# Altium PCB PCB1.PcbDoc
Units mm, origin at the board's own origin, x right, y up, seen from the top; angles counter-clockwise.
Board outline 85.6 x 31.6 mm, 4 copper layers (Top Layer, PWR, GND, Bottom Layer), stack 0.603 mm thick; 59 components, 36 nets, 215 pads, 179 vias.
Unrouted connection lines stored in the file: 43.
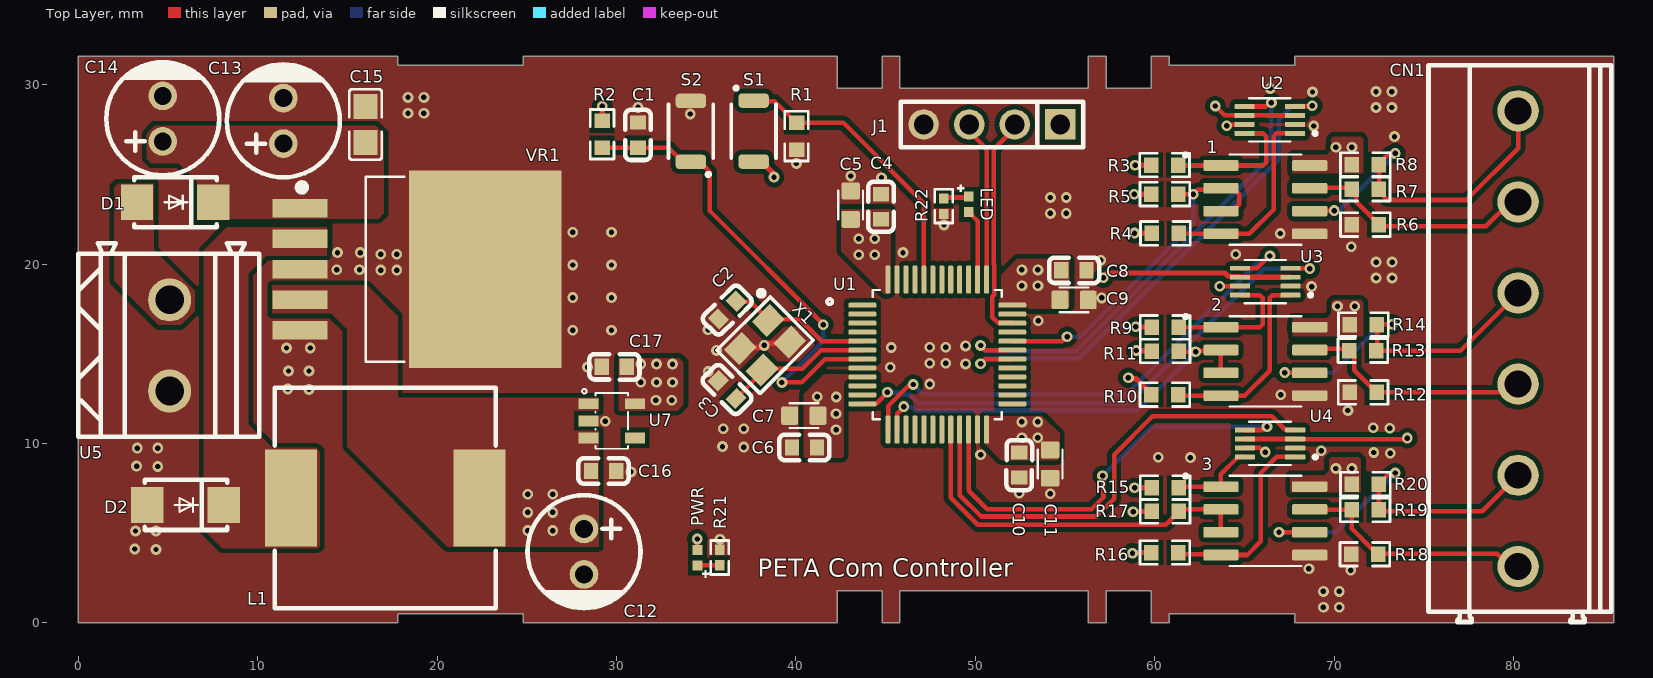
[diagram p0: Top Layer view]
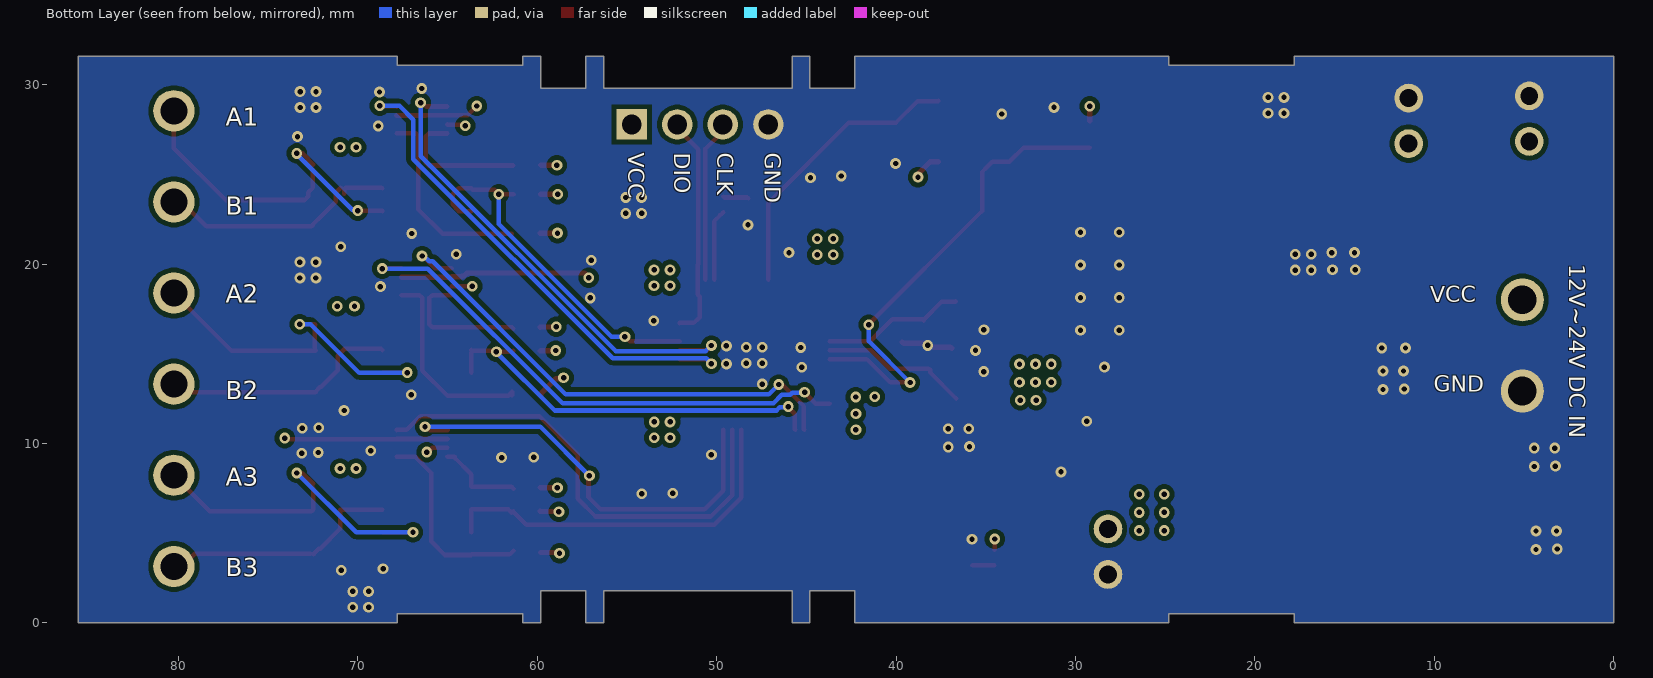
[diagram p1: Bottom Layer view, seen from below]
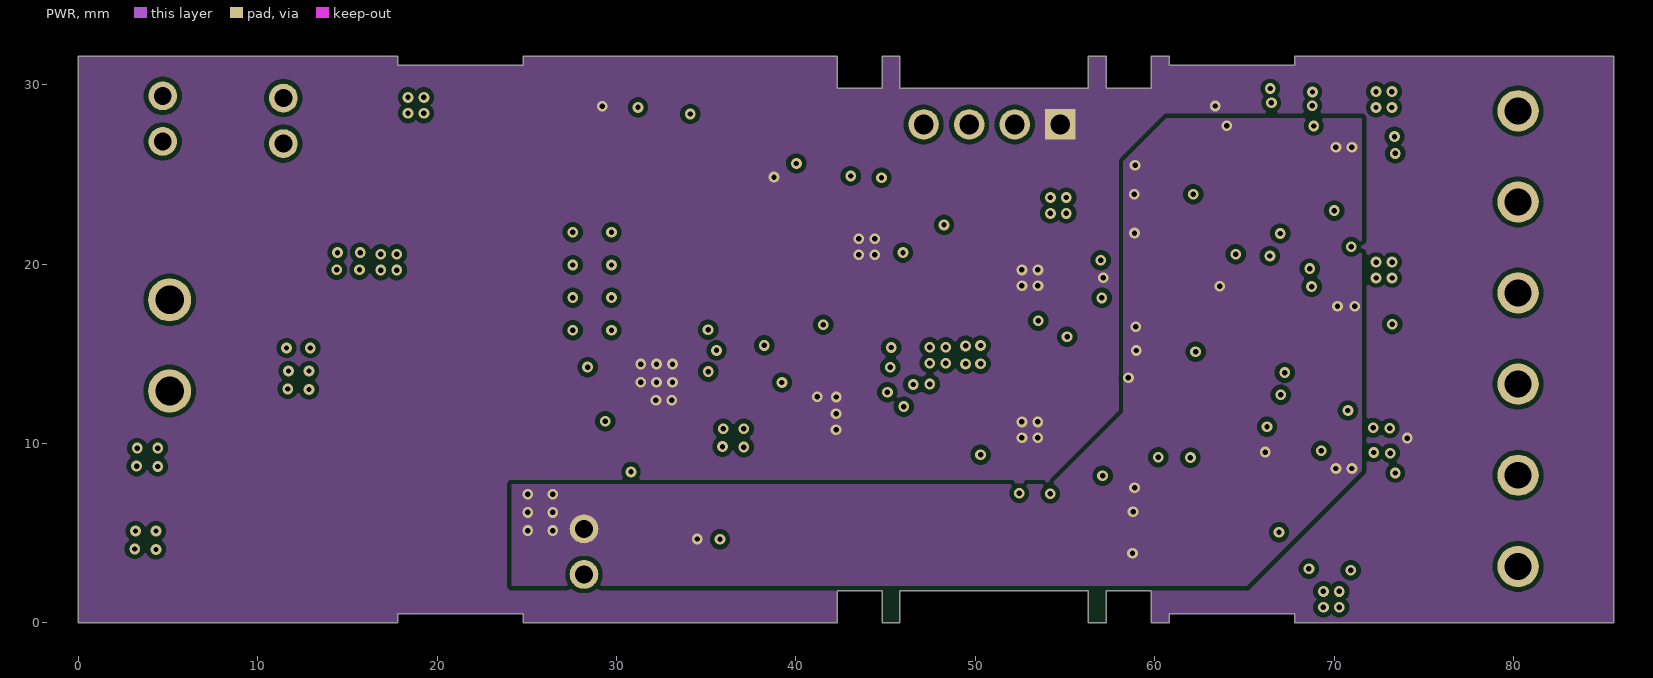
[diagram p2: PWR]
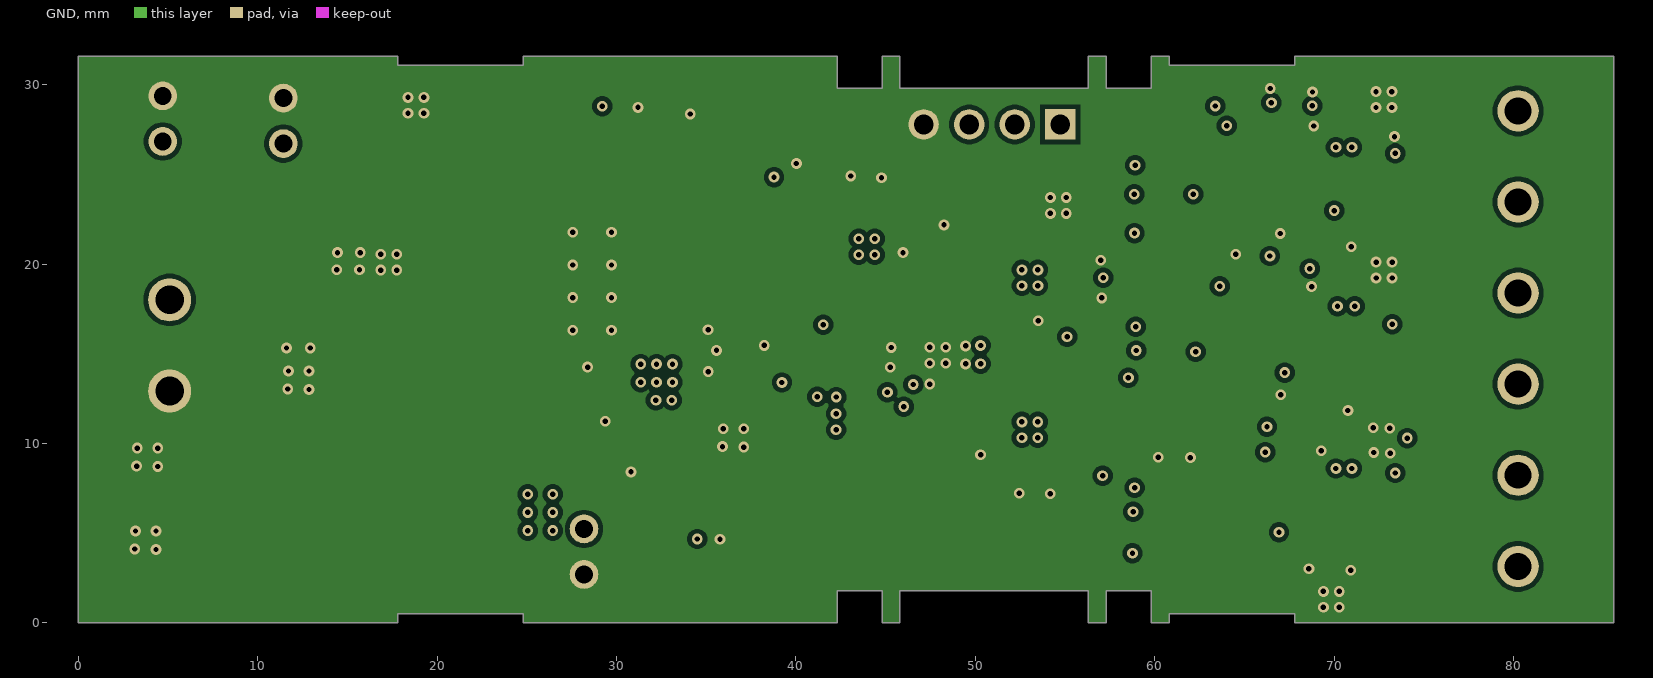
[diagram p3: GND]
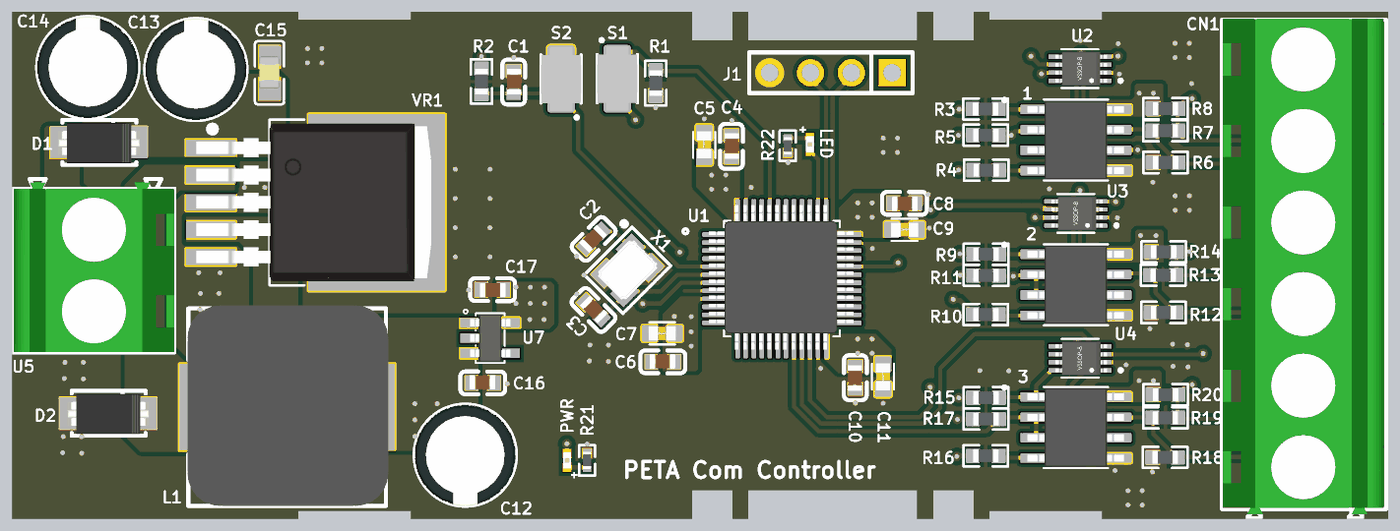
[diagram p4: 3D render of the assembled board from above, using the file's embedded part models]

## Layer stack, top to bottom
Top Solder: solder mask 0.0102, Solder Resist, Dk 3.5
Top Layer: signal copper 0.0356
Dielectric 2: prepreg 0.0711, PP-006, Dk 4.1
PWR: signal copper 0.035
Dielectric 1: dielectric 0.32, FR-4, Dk 4.8
GND: signal copper 0.035
Dielectric 3: prepreg 0.0711, PP-006, Dk 4.1
Bottom Layer: signal copper 0.0356
Bottom Solder: solder mask 0.0102, Solder Resist, Dk 3.5

## Board outline
24.8,0 42.3,0 42.3,1.8 44.8,1.8 44.8,0 45.8,0 45.8,1.8 56.3,1.8 56.3,0 57.3,0 57.3,1.8 59.8,1.8 59.8,0 60.8,0 60.8,0.5 67.8,0.5 67.8,0 85.6,0 85.6,31.6 67.8,31.6 67.8,31.1 60.8,31.1 60.8,31.6 59.8,31.6 59.8,29.8 57.3,29.8 57.3,31.6 56.3,31.6 56.3,29.8 45.8,29.8 45.8,31.6 44.8,31.6 44.8,29.8 42.3,29.8 42.3,31.6 24.8,31.6 24.8,31.1 17.8,31.1 17.8,31.6 0,31.6 0,0 17.8,0 17.8,0.5 24.8,0.5

## Design rules (kind name [scope] priority, off if disabled: settings)
Clearance [All] p1: gap=0.15 ignorepadtopadclearanceinfootprint=TRUE except(0: Arc-Hole Track-Hole SMDPad-Hole THPad-Hole Via-Hole Fill-Hole Poly-Hole Region-Hole Text-Hole; 0.254: Arc-Fill Arc-Poly Arc-Region Track-Fill Track-Poly Track-Region SMDPad-Fill SMDPad-Poly SMDPad-Region THPad-Fill THPad-Poly THPad-Region Via-Fill Via-Poly Via-Region Fill-Fill Fill-Poly Fill-Region Poly-Poly Poly-Region Region-Region)
PolygonConnect [All] p1: connectstyle=Direct reliefconductorwidth=0.254 reliefentries=4 polygonreliefangle="90 Angle" airgapwidth=0.254
RoutingVias [All] p1: holewidth=0.711 width=1.27 viastyle="Through Hole" minholewidth=0.711 minwidth=1.27 maxholewidth=0.711 maxwidth=1.27
SolderMaskExpansion [All] p1: expansion=0.102 istentingtop=FALSE
Width Width_2 [All] p1: maxlimit=0.3 minlimit=0.254 preferedwidth=0.254 minimp=50.000000 maximp=50.000000 favimp=50.000000
30 further rules are at their usual default settings.

## Classes and differential pairs
net class +3.3V: V_MCU_3.3V
component class STM32F103C8T6: C1 C2 C3 C4 C5 C6 C7 C8 C9 C10 C11 J1 LED R1 R2 R22 S1 S2 U1 X1
component class RS485: 1 2 3 CN1 R3 R4 R5 R6 R7 R8 R9 R10 R11 R12 R13 R14 R15 R16 R17 R18 R19 R20 U2 U3 U4
component class "12V to5v_5V to 3.3V": C12 C13 C14 C15 C16 C17 D1 D2 L1 PWR R21 U5 U7 VR1

## Components (designator, comment, footprint, x,y, rotation, side; value= is the part's Value field where it differs from the comment)
1 "MAX485" MAX485 66.168,23.599 r0 top
2 "MAX485" MAX485 66.168,14.582 r0 top
3 "MAX485" MAX485 66.168,5.692 r0 top
C1 "CC0603KRX7R9BB104" C0603 31.191,27.201 r270 top value=100nf,50V,±10%
C2 "20pF" C0603 36.178,17.444 r45 top value=20pF,50V,5%
C3 "20pF" C0603 36.16,13.007 r315 top value=20pF,50V,5%
C4 "CC0603KRX7R9BB104" C0603 44.74,23.199 r270 top value=100nf,50V,±10%
C5 "10uf" CAPC1608X90N 43.049,23.282 r270 top value=16V,10uF
C6 "CC0603KRX7R9BB104" C0603 40.477,9.78 r0 top value=100nf,50V,±10%
C7 "10uf" CAPC1608X90N 40.45,11.558 r0 top value=16V,10uF
C8 "CC0603KRX7R9BB104" C0603 55.5,19.662 r180 top value=100nf,50V,±10%
C9 "10uf" CAPC1608X90N 55.5,18.011 r180 top value=16V,10uF
C10 "CC0603KRX7R9BB104" C0603 52.452,8.805 r90 top value=100nf,50V,±10%
C11 "10uf" CAPC1608X90N 54.173,8.867 r90 top value=16V,10uF
C12 "470uF" Plugin,6.3x8mm 28.179,3.942 r270 top
C13 "220uF" Plugin,6.3x8mm 11.427,28.024 r90 top value=35V,220uF
C14 "220uF" Plugin,6.3x8mm 4.704,28.144 r90 top value=35V,220uF
C15 "1uf" C0805 16.003,27.79 r270 top
C16 "2.2uF,6.3V,10%" C0603 29.277,8.468 r0 top
C17 "2.2uF,6.3V,10%" C0603 29.871,14.281 r180 top
CN1 "DB128V-5.08-6P-GN-S" 6P_P=5.08mm 80.265,15.852 r90 top
D1 "SS34" SMA 5.391,23.453 r180 top value=40V,3A
D2 "SS34" SMA 5.97,6.581 r180 top
J1 "*" PIN_4,P=2.54mm 50.928,27.79 r180 top
L1 "68uH" ind_SMD_12.3x12.3mm 17.103,6.962 r0 top value=68uH,4A
LED "XL-1005UBC" "LED 0402" 49.634,23.335 r270 top value=Blue,20mA
PWR "XL-1005UBC" "LED 0402" 34.515,3.641 r90 top value=Blue,20mA
R1 "10K,75V,1%" R0603 40.031,27.145 r270 top
R2 "10K,75V,1%" R0603 29.189,27.246 r90 top
R3 "0603WAF100JT5E" R0603 60.553,25.531 r180 top value=10kΩ,75V
R4 "0603WAF100JT5E" R0603 60.592,21.723 r180 top value=10kΩ,75V
R5 "0603WAF100JT5E" R0603 60.568,23.902 r180 top value=10kΩ,75V
R6 "20k" R0603 71.747,22.202 r180 top value=20k,75V
R7 "120R" R0603 71.736,24.181 r0 top value=120Ω.75V
R8 "20k" R0603 71.742,25.559 r0 top value=20k,75V
R9 "0603WAF100JT5E" R0603 60.583,16.484 r180 top value=10kΩ,75V
R10 "0603WAF100JT5E" R0603 60.568,12.732 r180 top value=10kΩ,75V
R11 "0603WAF100JT5E" R0603 60.583,15.16 r180 top value=10kΩ,75V
R12 "20k" R0603 71.62,12.86 r180 top value=20k,75V
R13 "120R" R0603 71.603,15.182 r0 top value=120Ω.75V
R14 "20k" R0603 71.631,16.63 r0 top value=20k,75V
R15 "0603WAF100JT5E" R0603 60.581,7.549 r180 top value=10kΩ,75V
R16 "0603WAF100JT5E" R0603 60.564,3.926 r180 top value=10kΩ,75V
R17 "0603WAF100JT5E" R0603 60.581,6.219 r180 top value=10kΩ,75V
R18 "20k" R0603 71.719,3.829 r180 top value=20k,75V
R19 "120R" R0603 71.736,6.303 r0 top value=120Ω.75V
R20 "20k" R0603 71.749,7.739 r0 top value=20k,75V
R21 "2.2KΩ" R0402 35.756,3.648 r270 top value=2.2kΩ,50V,1%
R22 "2.2KΩ" R0402 48.242,23.238 r90 top value=2.2kΩ,50V,1%
S1 "B3U-1000P" B3U-1000P 37.636,27.42 r90 top
S2 "B3U-1000P" B3U-1000P 34.143,27.404 r270 top
U1 "STM32F103C8T6" STM32F103C8T6 47.88,14.963 r0 top
U2 "TXS0102DCUR" 8-VSSOP 66.422,28.044 r180 top value="2 Channel 24Mbps"
U3 "TXS0102DCUR" 8-VSSOP 66.168,19.027 r180 top value="2 Channel 24Mbps"
U4 "TXS0102DCUR" 8-VSSOP 66.43,10.006 r180 top value="2 Channel 24Mbps"
U5 "DB128L-5.08-2P-GN-S" 2P_P=5.08mm 5.081,15.471 r270 top
U7 "SE5218ALG-LF" SOT-23-5 29.729,11.265 r180 top
VR1 "LM2596S-5.0" TO-263-5 16.858,19.741 r180 top
X1 "8MHz" SMD3225-4P 38.279,15.484 r225 top

## Footprints (in the part's own frame and the unit in brackets; to place one, negate y for a bottom-side part, rotate by r counter-clockwise, add the part's x,y. Pads: shape width x height; smd on the part's side, far side on the other; paste and mask are expansions set on the pad)
2P_P=5.08mm [mm]
  round 2.4 hole 1.6: 1(-2.54,0) 2(2.54,0)
  silkscreen extent -5.7,-5.1 5.1,5, body extent -5.48,-5 5.08,5, height 14
6P_P=5.08mm [mm]
  round 2.3 hole 1.5 paste+0 mask+0.05: 1(-12.7,0) 2(-7.62,0) 3(-2.54,0) 4(2.54,0) 5(7.62,0) 6(12.7,0)
  silkscreen extent -15.8,-5.2 15.24,5, body extent -15.57,-5.05 15.31,4.95, height 14
8-VSSOP [mm]
  rrect25% 1.12x0.27 smd: 1(-1.405,0.75) 2(-1.405,0.25) 3(-1.405,-0.25) 4(-1.405,-0.75) 5(1.405,-0.75) 6(1.405,-0.25) 7(1.405,0.25) 8(1.405,0.75)
  silkscreen extent -2.62,-1.2 1.15,1.2, body extent -1.67,-1.05 1.53,1.05, height 0.9
B3U-1000P [mm]
  rrect50% 0.8x1.7 smd: 1(1.7,0) 2(-1.7,0)
  silkscreen extent -1.5,-1.25 2.49,1.25, body extent -2,-1.25 2,1.25, height 1.6
C0603 [mm]
  rect 0.8x0.9 smd paste+0 mask+0.051: 1(-0.7,0) 2(0.7,0)
  silkscreen extent -1.41,-0.71 1.39,0.72, body extent -0.83,-0.42 0.77,0.48, height 0.8
C0805 [mm]
  rect 1.41x1.35 smd paste-100 mask+0.051: 1(-1,0) 2(1,0)
  silkscreen extent -1.96,-0.9 1.96,0.9, body extent -1.03,-0.64 0.97,0.62, height 1.23
CAPC1608X90N [mm]
  rrect20% 0.94x1.02 smd: 1(-0.8,0) 2(0.78,0)
  silkscreen extent -0.81,-0.69 0.79,0.69, body extent -0.87,-0.45 0.83,0.45, height 0.9
ind_SMD_12.3x12.3mm [mm]
  rect 2.9x5.4 smd: 1(-5.25,0) 2(5.25,0)
  silkscreen extent -6.15,-6.15 6.15,6.15, body extent -6.21,-6.16 6.29,6.34, height 6
"LED 0402" [mm]
  rect 0.566x0.54 smd paste-100 mask+0.051: 1(-0.433,0) 2(0.433,0)
  silkscreen extent -1.11,-0.65 -0.71,-0.25, body extent -0.5,-0.26 0.5,0.24, height 0.35
MAX485 [mm]
  rrect25% 1.97x0.59 smd: 1(-2.475,1.905) 2(-2.475,0.635) 3(-2.475,-0.635) 4(-2.475,-1.905) 5(2.475,-1.905) 6(2.475,-0.635) 7(2.475,0.635) 8(2.475,1.905)
  silkscreen extent -4.54,-2.52 2,2.59, body extent -3.01,-2.45 2.99,2.45, height 1.75
PIN_4,P=2.54mm [mm]
  rect 1.7x1.7 hole 1.1 paste+0 mask+0.051: 1(-3.81,0)
  round 1.7 hole 1.1 paste+0 mask+0.051: 2(-1.27,0) 3(1.27,0) 4(3.81,0)
  silkscreen extent -5.08,-1.27 5.08,1.27
Plugin,6.3x8mm [mm]
  round 1.6 hole 1: 1(-1.3,0.005) 2(1.24,0.005)
  silkscreen extent -3.18,-3.15 3.14,3.15, body extent -3.17,-3.15 3.13,3.15, height 8
R0402 [mm]
  rect 0.566x0.54 smd paste-100 mask+0.051: 1(-0.433,0) 2(0.433,0)
  silkscreen extent -0.94,-0.5 0.94,0.5, body extent -0.55,-0.25 0.55,0.25, height 0.32
R0603 [mm]
  rect 0.806x0.864 smd paste-100 mask+0.051: 1(-0.753,0) 2(0.753,0)
  silkscreen extent -1.39,-0.66 1.39,0.66, body extent -0.8,-0.4 0.8,0.4, height 0.45
SMA [mm]
  rect 1.801x1.999 smd mask+0.05: A(2.129,0) C(-2.129,0)
  silkscreen extent -2.33,-1.4 2.27,1.4, body extent -2.56,-1.21 2.54,1.29, height 2.41
SMD3225-4P [mm]
  rect 1.4x1.2 smd paste+0 mask+0.051: 1(-1.1,-0.85) 2(1.1,-0.85) 3(1.1,0.85) 4(-1.1,0.85)
  silkscreen extent -2.1,-2.35 2.1,1.7, body extent -1.62,-1.26 1.58,1.24, height 0.55
SOT-23-5 [mm]
  rect 1.1x0.6 smd: 1(1.3,-0.95) 2(1.3,0) 3(1.3,0.95) 4(-1.3,0.95) 5(-1.3,-0.95)
  silkscreen extent -0.9,-1.78 1.65,1.55, body extent -1.26,-1.5 1.24,1.5, height 1.1
STM32F103C8T6 [mm]
  rrect50% 1.56x0.28 smd: 1(-4.18,2.75) 2(-4.18,2.25) 3(-4.18,1.75) 4(-4.18,1.25) 5(-4.18,0.75) 6(-4.18,0.25) 7(-4.18,-0.25) 8(-4.18,-0.75) 9(-4.18,-1.25) 10(-4.18,-1.75) 11(-4.18,-2.25) 12(-4.18,-2.75) 25(4.18,-2.75) 26(4.18,-2.25) 27(4.18,-1.75) 28(4.18,-1.25) 29(4.18,-0.75) 30(4.18,-0.25) 31(4.18,0.25) 32(4.18,0.75) 33(4.18,1.25) 34(4.18,1.75) 35(4.18,2.25) 36(4.18,2.75)
  rrect50% 0.28x1.56 smd: 13(-2.75,-4.18) 14(-2.25,-4.18) 15(-1.75,-4.18) 16(-1.25,-4.18) 17(-0.75,-4.18) 18(-0.25,-4.18) 19(0.25,-4.18) 20(0.75,-4.18) 21(1.25,-4.18) 22(1.75,-4.18) 23(2.25,-4.18) 24(2.75,-4.18) 37(2.75,4.18) 38(2.25,4.18) 39(1.75,4.18) 40(1.25,4.18) 41(0.75,4.18) 42(0.25,4.18) 43(-0.25,4.18) 44(-0.75,4.18) 45(-1.25,4.18) 46(-1.75,4.18) 47(-2.25,4.18) 48(-2.75,4.18)
  silkscreen extent -6.15,-3.6 3.6,3.6, body extent -4.55,-4.41 4.45,4.59, height 1.72
TO-263-5 [mm]
  rect 3.083x1.02 smd: 1(4.507,-3.371) 2(4.507,-1.671) 3(4.507,0.029) 4(4.507,1.729) 5(4.507,3.429)
  rect 8.5x11 smd: 6(-5.813,0.029)
  silkscreen extent -1.31,-5.13 4.6,5.19, body extent -9.19,-4.89 5.41,4.93, height 4.22

## Part data
1 2 3: "1/1 Transceiver Half RS422, RS485 8-SOIC", Manufacturer="Maxim Integrated", Package="SOIC-8 Maxim Integrated", MPN=MAX485
C1 C4 C6 C8 C10: "50V 100nF X7R ±10% 0603 Multilayer Ceramic Capacitors MLCC - SMD/SMT ROHS", LCSC=C14663, Manufacturer=KEMET, Max Operating Temp="35 °C", Min Operating Temp="15 °C", MPN=603-CC603KRX7R9BB104, Package=0603, Datasheet=http://componentsearchengine.com/Datasheets/3/CC0603KRX7R9BB104.pdf
C2 C3: library part CL10C200JB8NNNC, "50V 20pF C0G ±5% 0603 Multilayer Ceramic Capacitors MLCC - SMD/SMT ROHS", LCSC=C1648, Manufacturer="SHOU HAN", Max Operating Temp=+125, Min Operating Temp=-55, Package=0603, Datasheet=https://datasheet.lcsc.com/lcsc/2304140030_Samsung-Electro-Mechanics-CL10C200JB8NNNC_C1648.pdf, MPN=CL10C200JB8NNNC
C5 C7 C9 C11: library part 0603F106M160NT, "16V 10uF Y5V ±20% 0603 Multilayer Ceramic Capacitors MLCC - SMD/SMT ROHS", LCSC=C48906, Manufacturer=KEMET, MPN=CC0603KRX7R9BB104, Package=0603, Datasheet=http://componentsearchengine.com/Datasheets/3/CC0603KRX7R9BB104.pdf
C12: library part SPTOJM471E08OR, "6.3V 470uF ±20% Plugin,6.3x8mm Solid Capacitors ROHS", Manufacturer=Panasonic, MPN=EEE-HC1H101P, Package Reference="RADIAL-2 Panasonic"
C13 C14: library part NPXC1101V221MJTM, "220uF 35V ±20% Plugin,D6.3xL11mm Aluminum Electrolytic Capacitors - Leaded ROHS", LCSC=C2976311, Manufacturer=Ymin, Package=Plugin,D6.3xL11mm, Datasheet=https://www.lcsc.com/datasheet/lcsc_datasheet_2205250916_Ymin-NPXC1101V221MJTM_C2976311.pdf, MPN=NPXC1101V221MJTM
C15: library part CL21B105KBFNNNE, "50V 1uF X7R ±10% 0805 Multilayer Ceramic Capacitors MLCC - SMD/SMT ROHS", Manufacturer=KEMET, MPN=CC0603JRNPO9BN180
C16 C17: library part CGA3E1X7R0J225K080AC, "CAP CER 2.2UF 6.3V X7R 0603", Manufacturer="TDK Corporation", Max Operating Temp=125°C, Min Operating Temp=-55°C, Package=0603, Datasheet=https://product.tdk.com/system/files/dam/doc/product/capacitor/ceramic/mlcc/catalog/mlcc_automotive_general_en.pdf, MPN=CGA3E1X7R0J225K080AC, Type=SM
CN1: "1x6P 20A -40℃~+105℃ 300V Green 12~30 Direct Insert 5.08mm 2.5 1 6 Plugin,P=5.08mm Screw Terminal", LCSC=C2915642, Manufacturer=DORABO, Operating Temperature Range=-40℃~+105℃, Package=插件,P=5.08mm, Datasheet=https://atta.szlcsc.com/upload/public/pdf/source/20230106/CC449C10514519CDCE20F1C37DBF2DAC.pdf, MPN=DB128V-5.08-6P-GN-S
D1: "Diode Schottky 40V 3A 2-Pin SMC T/R", Package=None, MPN=SS34
D2: "Diode Schottky 40V 3A 2-Pin SMC T/R", Package Reference=None, MPN=SS34
J1: library part PZ254V-11-04P, "Straight Square Pins 2.5mm 4P 6mm -40℃~+105℃ 3mm 2.54mm Plugin Black Brass 1x4P Plugin,P=2.54mm Pin Headers ROHS", LCSC=C2691448, Manufacturer=XFCN, Max temp=105°C, Min temp=-40°C, Package=Plugin,P=2.54mm, Datasheet=https://datasheet.lcsc.com/lcsc/2304140030_XFCN-PZ254V-11-04P_C492403.pdf, MPN=PZ254V-11-04P, Type=TH
L1: library part SMDRI127-680MT, "2.1A 68uH Shielded inductor ±20% 4A SMD,12.3x12.3mm Power Inductors ROHS", LCSC=C9907, Manufacturer=SXN(顺翔诺), Package=SMD,12.3x12.3mm, Datasheet=https://atta.szlcsc.com/upload/public/pdf/source/20210810/6F96FDC19AA308DD2AD166FFB9640E87.pdf, MPN=SMDRI127-680MT
LED PWR: "20mA 240mcd Colorless Transparent Lens -20℃~+85℃ 455nm~475nm Positive Stick Blue 120° 70mW 3.3V 0402 LED Indication - Discrete ROHS", LCSC=C22355736, Manufacturer=XINGLIGHT, Package=0402, Datasheet=https://www.lcsc.com/datasheet/lcsc_datasheet_2409271833_XINGLIGHT-XL-1005UBC_C22355736.pdf, MPN=XL-1005UBC
R1 R2: library part 0603WAF1002T5E, "100mW Thick Film Resistors ±100ppm/℃ ±1% 10kΩ 0603 Chip Resistor - Surface Mount ROHS", LCSC=C25804, Manufacturer="UNI-ROYAL(Uniroyal Elec)", Max Operating Temp=155℃, Min Operating Temp=-55℃, Package=0603, Datasheet=https://datasheet.lcsc.com/szlcsc/Uniroyal-Elec-0603WAF1002T5E_C25804.pdf, MPN=0603WAF1002T5E
R3 R4 R5 R9 R10 R11 R15 R16 R17: "100mW Thick Film Resistors ±1% ±400ppm/℃ 10Ω 0603 Chip Resistor - Surface Mount ROHS", LCSC=C25804, Manufacturer="UNI-ROYAL(Uniroyal Elec)", MPN=0603WAF1002T5E, Package=0603, Datasheet=https://datasheet.lcsc.com/szlcsc/Uniroyal-Elec-0603WAF1002T5E_C25804.pdf
R6 R8 R12 R14 R18 R20: library part 0603WAF2002T5E, "100mW Thick Film Resistors ±100ppm/℃ ±1% 20kΩ 0603 Chip Resistor - Surface Mount ROHS", LCSC=C4184, Manufacturer="UNI-ROYAL(Uniroyal Elec)", MPN=0603WAF1002T5E, Package=0603, Datasheet=https://datasheet.lcsc.com/szlcsc/Uniroyal-Elec-0603WAF1002T5E_C25804.pdf
R7 R13 R19: library part 0603WAF1200T5E, "100mW Thick Film Resistors 75V ±100ppm/℃ ±1% 120Ω 0603 Chip Resistor - Surface Mount ROHS", LCSC=C22787, Manufacturer="UNI-ROYAL(Uniroyal Elec)", MPN=0603WAF1002T5E, Package=0603, Datasheet=https://datasheet.lcsc.com/szlcsc/Uniroyal-Elec-0603WAF1002T5E_C25804.pdf
R21 R22: library part RC0402FR-072K2L, "62.5mW Thick Film Resistors 50V ±100ppm/℃ ±1% 2.2kΩ 0402 Chip Resistor - Surface Mount ROHS", LCSC=C114762, Manufacturer=YAGEO, Max Operating Temp=+155, Min Operating Temp=-55, Package=0402, Datasheet=https://datasheet.lcsc.com/lcsc/2304140030_YAGEO-RC0402FR-072K2L_C114762.pdf, MPN=RC0402FR-072K2L
S1 S2: "2.5mm 1.6mm Round Button 50mA Brick nogging 3mm SPST 153gf 12V SMD,2.5x3mm Tactile Switches ROHS", LCSC=C231329, Manufacturer="Omron Electronics", MPN=653-B3U-1000P, Datasheet=https://www.omron.com/ecb/products/pdf/en-b3u.pdf
U1: "Mainstream Performance line, ARM Cortex-M3 MCU with 64 Kbytes Flash, 72 MHz CPU, motor control, USB and CAN", LCSC=C8734, Manufacturer=STMicroelectronics, Package=LQFP-48(7x7), Datasheet=https://datasheet.lcsc.com/lcsc/2302211130_STMicroelectronics-STM32F103C8T6_C8734.pdf
U2 U3 U4: "2-Bit Bidirectional Voltage-Level Shifter for Open-Drain and Push-Pull Application 8-VSSOP -40 to 85", LCSC=C53434, Manufacturer="Texas Instruments", Package="VSSOP-8 Texas Instruments", Datasheet=https://www.ti.com/general/docs/suppproductinfo.tsp?distId=10&gotoUrl=https%3A%2F%2Fwww.ti.com%2Flit%2Fgpn%2Ftxs0102, MPN=TXS0102DCUR
U5: "1x2P 18A -40℃~+105℃ 250V Green 12~30 Direct Insert 5.08mm 2.5 1 2 Plugin,P=5.08mm Screw Terminal", LCSC=C395868, Manufacturer=DORABO, Operating Temperature Range=-40℃~+105℃, Package=插件,P=5.08mm, Datasheet=https://atta.szlcsc.com/upload/public/pdf/source/20230106/B067FE0E641A396A370D47F93C345689.pdf, MPN=DB128L-5.08-2P-GN-S
U7: "75dB 500mA Adjustable 3.3V Positive electrode 5V SOT-23-5 Voltage Regulators - Linear, Low Drop Out (LDO) Regulators ROHS", LCSC=C118233, Manufacturer=SEAWARD(思旺), Package=SOT-23-5, Datasheet=https://www.lcsc.com/datasheet/lcsc_datasheet_2304140030_Seaward-Elec-SE5218ALG-LF_C118233.pdf, MPN=SE5218ALG-LF
VR1: "Step-down type Fixed 40V~40V 5V 3A TO-263-5 DC-DC Converters ROHS", Package Reference=None, MPN=LM2596S-5.0
X1: library part X32258MSB4SI, "8MHz Surface Mount Crystal 20pF ±10ppm ±20ppm SMD3225-4P Crystals ROHS", LCSC=C2682774, Manufacturer=YXC, Operating Temperature=-40℃~+85℃, Package=SMD3225-4P, Datasheet=https://www.lcsc.com/datasheet/lcsc_datasheet_2411121006_YXC-Crystal-Oscillators-X32258MSB4SI_C2682774.pdf, MPN=X32258MSB4SI

## Via types
v1: diameter 0.6, hole 0.3, Top Layer to Bottom Layer, tented both sides, 179 vias

## Nets (pads, with @x,y where several pads share a name; then routed paths per layer and width w, separated by ;. In a path a pad name is that pad's centre, name@x,y a point inside that pad or via, vN(x,y) a via of type N, cw(c..) or ccw(c..) an arc to the next point about the centre after c; other vN are vias at no path point)
+5V: 1.8 2.8 3.8 C12.1 C16.1 L1.2 PWR.2 R3.2 R4.2 R5.2 R8.1 R9.2 R10.2 R11.2 R14.1 R15.2 R16.2 R17.2 R20.1 U2.7 U3.7 U4.7 U7.1 U7.3 VR1.4 | length 13.3
  Top Layer w0.254: v1(34.499,4.68) 34.507,4.672 34.507,4.082 PWR.2 ; v1(63.628,18.773) 63.63,18.775 64.761,18.775 U3.7 ; v1(64.023,27.725) 64.084,27.786 65.009,27.786 U2.7 ; U4.7 65.862,9.756 66.093,9.525 v1(66.171,9.525)
  Top Layer w0.3: v1(58.535,13.676) 58.592,13.619 58.957,13.619 59.815,12.761 R10.2 ; v1(58.761,3.89) 58.788,3.89 58.824,3.926 R16.2 ; v1(58.797,6.201) 58.806,6.21 59.819,6.21 R17.2 ; v1(58.861,23.897) 58.864,23.9 59.812,23.9 R5.2 ; v1(58.875,21.735) 58.881,21.729 59.833,21.729 R4.2 ; v1(58.879,7.54) 58.884,7.545 59.823,7.545 R15.2 ; v1(58.908,25.514) 58.917,25.523 59.791,25.523 R3.2 ; v1(58.947,16.513) 58.962,16.499 59.815,16.499 R9.2 ; v1(58.97,15.187) 58.984,15.174 59.816,15.174 R11.2
  other v1: 25.044,5.147 26.441,5.147 25.044,6.163 26.441,6.163 25.044,7.179 26.441,7.179 70.105,8.613 70.994,8.613 70.193,17.652 71.155,17.652 70.105,26.52 70.994,26.52
+12V: D1.A U5.1
BOOT0: R1.1 S1.1 U1.44 | length 16.1
  Top Layer w0.254: S1.1 37.662,29.094 38.807,29.094 40.002,27.899 R1.1 42.627,27.899 47.13,23.396 U1.44
CRYSTAL_IN: C2.2 U1.5 X1.1 | length 8
  Top Layer w0.254: C2.2 36.708,17.904 37.463,17.904 38.456,16.911 X1.1 38.526,16.934 40.211,16.934 41.432,15.713 U1.5
CRYSTAL_OUT: C3.2 U1.6 X1.3 | length 8.2
  Top Layer w0.254: C3.2 38.102,13.959 X1.3 38.173,14.176 40.358,14.176 41.395,15.213 U1.6
GND: 1.5 2.5 3.5 C1.1 C2.1 C3.1 C4.1 C5.1 C6.1 C7.1 C8.1 C9.1 C10.1 C11.1 C12.2 C13.2 C14.2 C15.1 C16.2 C17.2 D2.A J1.4 R1.2 R6.2 R12.2 R18.2 R21.1 R22.1 S2.2 U1.8 U1.23 U1.35 U1.47 U2.2 U3.2 U4.2 U5.2 U7.2 VR1.3 VR1.5 VR1.6 X1.2 X1.4 | length 2.9
  Top Layer w0.3: X1.2 36.971,15.378 38.053,15.378 38.149,15.474 38.311,15.474 38.427,15.59 39.587,15.59 X1.4
  other v1: 69.407,0.869 70.296,0.869 69.407,1.758 70.296,1.758 70.933,2.934 68.6,3.019 4.319,4.097 3.135,4.124 35.764,4.666 3.176,5.126 4.319,5.126 54.182,7.202 52.446,7.224 30.802,8.422 4.424,8.719 3.24,8.746 61.992,9.217 60.203,9.238 50.293,9.375 73.137,9.466 72.216,9.505 69.287,9.594 3.281,9.748 4.424,9.748 37.086,9.804 35.902,9.831 35.943,10.833 37.086,10.833 73.109,10.849 72.192,10.887 29.367,11.25 70.774,11.844 67.031,12.725 12.854,13.018 11.67,13.045 47.457,13.316 35.116,14.012 11.711,14.047 12.854,14.047 28.384,14.262 45.257,14.251 49.457,14.441 47.46,14.483 48.349,14.483 35.568,15.193 11.599,15.331 12.921,15.331 45.307,15.354 47.46,15.372 48.349,15.372 49.457,15.446 38.23,15.474 27.56,16.318 29.719,16.318 35.101,16.345 53.511,16.846 57.048,18.122 27.56,18.138 29.719,18.138 68.748,18.752 72.346,19.229 73.235,19.229 16.851,19.67 17.74,19.67 14.398,19.686 15.668,19.686 27.56,19.958 29.719,19.958 72.346,20.118 73.235,20.118 56.987,20.217 16.851,20.559 17.74,20.559 64.517,20.551 14.438,20.648 15.708,20.648 45.966,20.649 70.964,20.968 67.003,21.712 27.56,21.779 29.719,21.779 48.257,22.19 54.185,22.831 55.074,22.831 54.185,23.72 55.074,23.72 44.767,24.82 43.051,24.916 40.024,25.618 73.37,27.114 68.871,27.707 34.107,28.374 18.369,28.41 19.258,28.41 31.197,28.741 72.339,28.736 73.228,28.736 18.369,29.299 19.258,29.299 68.797,29.603 72.339,29.625 73.228,29.625 66.438,29.798
Net1_1: 1.1 R3.1 U2.8 | length 7.7
  Top Layer w0.254: R3.1@61.333,25.504 1.1 66.06,25.504 66.209,25.653 66.209,27.137 66.06,27.286 65.025,27.286 U2.8
Net1_4: 1.4 R4.1 U2.1 | length 11.1
  Top Layer w0.254: R4.1@61.417,21.703 63.684,21.703 1.4 65.279,21.694 66.633,23.048 66.633,27.145 66.782,27.294 U2.1
Net2_1: 2.1 R9.1 U3.8 | length 7.6
  Top Layer w0.254: R9.1@61.331,16.407 61.411,16.487 2.1 65.864,16.487 66.013,16.636 66.013,18.128 65.864,18.277 U3.8
Net2_4: 2.4 R10.1 U3.1 | length 11.1
  Top Layer w0.254: R10.1@61.411,12.686 R10.1@61.411,12.881 ; R10.1@61.422,12.863 61.619,12.665 2.4@63.681,12.665 ; 2.4 65.025,12.677 66.417,14.069 66.417,18.128 66.566,18.277 U3.1
Net3_1: 3.1 R15.1 U4.8 | length 4.9
  Top Layer w0.254: R15.1@61.329,7.48 61.433,7.584 63.68,7.584 3.1 63.693,8.297 64.592,9.196 64.592,9.248 64.6,9.256 U4.8
Net3_4: 3.4 R16.1 U4.1 | length 11.1
  Top Layer w0.254: R16.1@61.329,4.024 61.535,3.818 63.662,3.818 3.4 65.152,3.787 65.914,4.549 65.914,8.359 66.811,9.256 U4.1
NetC13_1: C13.1 C14.1 C15.2 D1.C VR1.1
NetD2_C: D2.C L1.1 VR1.2
NetLED_1: LED.1 R22.2 | length 1.4
  Top Layer w0.254: R22.2 48.291,23.719 49.586,23.719 LED.1
NetLED_2: LED.2 U1.38 | length 4
  Top Layer w0.254: LED.2 49.634,22.889 49.777,22.746 49.79,22.746 50.13,22.406 U1.38
NetPWR_1: PWR.1 R21.2 | length 1.2
  Top Layer w0.254: PWR.1 34.519,3.212 35.753,3.212 R21.2
NRST: C1.2 R2.1 S2.1 U1.7 | length 26.9
  Top Layer w0.254: R2.1 29.197,26.501 C1.2 32.896,26.501 33.693,25.704 34.633,25.704 34.906,25.431 34.915,25.431 35.206,25.14 35.206,22.968 41.527,16.647 v1(41.527,16.619) ; v1(39.219,13.408) 40.328,13.408 41.633,14.713 U1.7
  Bottom Layer w0.254: v1(39.219,13.408) 41.527,15.716 v1(41.527,16.619)
RS450_EN1: 1.2 1.3 R5.1 U1.32 | length 20
  Top Layer w0.254: U1.32 54.836,15.713 55.077,15.955 v1(55.117,15.955) ; R5.1 61.329,23.894 v1(62.151,23.894) ; v1@62.151,23.909 62.386,24.144 63.603,24.144 1.2 64.383,24.234 64.72,23.897 64.72,23.345 64.551,23.176 64.551,23.132 64.383,22.964 1.3
  Bottom Layer w0.254: v1(55.117,15.955) 55.863,15.955 62.151,22.243 v1@62.151,23.961
RS450_EN2: 2.2 2.3 R11.1 U1.14 | length 22.8
  Top Layer w0.254: U1.14 45.643,10.796 45.643,11.657 46.007,12.021 v1(46.007,12.06) ; R11.1 61.377,15.119 v1(62.28,15.119) ; v1@62.274,15.126 62.316,15.168 63.644,15.168 2.2 ; 2.2@63.611,15.131 63.693,15.049 2.3
  Bottom Layer w0.254: v1(46.007,12.06) 46.035,12.032 46.479,12.032 46.666,11.845 59.032,11.845 62.28,15.094 v1(62.28,15.119)
RS450_EN3: 3.2 3.3 R17.1 U1.20 | length 21.1
  Top Layer w0.254: U1.20 48.63,6.974 50.134,5.47 60.614,5.47 61.334,6.19 R17.1 ; R17.1@61.424,6.14 61.61,6.327 3.2 3.3
"RS485 A1": 1.6 CN1.6 R7.2 R8.2 | length 19.7
  Top Layer w0.254: 1.6 68.656,22.977 70.005,22.977 v1(70.018,22.99) ; R8.2 72.771,25.835 72.771,25.877 73.07,26.176 v1(73.407,26.176) ; R8.2@72.509,25.279 72.509,25.25 72.509,24.263 72.765,24.007 72.765,23.781 72.966,23.58 77.379,23.58 80.265,26.466 CN1.6
  Bottom Layer w0.254: v1(70.018,22.99) 70.046,23.018 70.295,23.018 v1@73.416,26.139
"RS485 A2": 2.6 CN1.4 R13.2 R14.2 | length 20.1
  Top Layer w0.254: v1(67.247,13.957) 67.252,13.952 68.638,13.952 2.6 ; R13.2 72.419,15.245 72.419,16.595 R14.2 72.405,16.651 v1(73.24,16.651) ; R13.2@72.364,15.174 77.047,15.174 CN1.4
  Bottom Layer w0.254: v1(67.247,13.957) 67.257,13.947 69.94,13.947 72.644,16.651 v1(73.24,16.651)
"RS485 A3": 3.6 CN1.2 R19.2 R20.2 | length 20.5
  Top Layer w0.254: v1(66.93,5.057) 3.6 ; R19.2 72.572,6.22 78.253,6.22 CN1.2 ; R19.2@72.5,6.312 R20.2@72.5,7.499 ; R20.2@72.502,7.764 72.502,7.768 72.778,8.044 72.782,8.044 73.095,8.357 73.405,8.357 v1(73.407,8.359)
  Bottom Layer w0.254: v1(66.93,5.057) 70.105,5.057 v1(73.407,8.359)
"RS485 B1": 1.7 CN1.5 R6.1 R7.1 | length 13.4
  Top Layer w0.254: 1.7 68.666,24.257 70.689,24.257 R7.1@70.748,24.197 ; R7.1@70.766,23.936 R7.1@70.766,24.115 ; R7.1@70.965,24.263 71.241,23.987 71.241,23.489 R6.1@72.223,22.507 ; R6.1@72.224,22.507 R6.1@72.518,22.213 ; R6.1@72.5,22.231 R6.1 72.584,22.118 78.46,22.118 79.814,23.472 CN1.5
"RS485 B2": 2.7 CN1.3 R12.1 R13.1 | length 13.3
  Top Layer w0.254: 2.7 68.715,15.289 70.743,15.289 71.126,14.906 71.126,14.093 72.054,13.165 72.097,13.165 72.359,12.903 R12.1@72.359,12.86 ; R12.1 79.259,12.86 79.711,13.312 CN1.3
"RS485 B3": 3.7 CN1.1 R18.1 R19.1 | length 13.4
  Top Layer w0.254: 3.7@68.654,6.316 R19.1@70.97,6.316 ; R19.1 70.983,5.262 72.111,4.134 72.196,4.134 72.472,3.858 R18.1 ; R18.1@72.632,3.856 79.093,3.856 79.797,3.152 CN1.1
SWDCLK: J1.3 U1.37 | length 9.2
  Top Layer w0.254: J1.3@50.039,28.023 49.935,27.919 49.935,27.122 50.63,26.427 U1.37
SWDIO: J1.2 U1.34 | length 12.5
  Top Layer w0.254: U1.34 52.047,16.726 51.276,16.726 50.951,17.051 50.951,18.193 51.047,18.289 51.047,19.997 51.034,20.01 51.034,26.414 52.198,27.578 J1.2
USART1_RX1: U1.31 U2.5 | length 27.3
  Top Layer w0.254: v1(50.293,15.471) 50.293,15.435 50.515,15.213 U1.31 ; U2.5 66.204,28.794 66.412,29.002 v1(66.506,29.002)
  Bottom Layer w0.254: v1@50.308,15.471 50.621,15.158 55.637,15.158 66.506,26.027 v1(66.506,29.002)
USART1_TX1: U1.30 U2.4 | length 28.6
  Top Layer w0.254: v1@50.293,14.476 50.53,14.713 U1.30 ; U2.4 67.835,28.802 68.722,28.802 68.749,28.83 v1(68.789,28.83)
  Bottom Layer w0.254: v1(50.293,14.455) 50.592,14.754 55.805,14.754 66.91,25.859 66.91,28.056 67.684,28.83 v1(68.789,28.83)
USART2_RX2: U1.13 U3.5 | length 28.5
  Top Layer w0.254: U1.13 45.143,10.796 45.143,12.093 46.275,13.225 46.471,13.225 v1(46.538,13.291) ; U3.5 65.704,19.777 66.386,20.459 v1(66.424,20.459)
  Bottom Layer w0.254: v1(46.538,13.291) 47.09,12.739 58.414,12.739 65.833,20.158 66.029,20.158 66.33,20.459 v1(66.424,20.459)
USART2_TX2: U1.12 U3.4 | length 29.7
  Top Layer w0.254: U1.12 43.713,12.226 44.484,12.226 45.099,12.842 v1(45.099,12.865) ; U3.4 67.581,19.769 68.632,19.769 v1(68.647,19.754)
  Bottom Layer w0.254: v1(45.099,12.865) 45.124,12.841 45.78,12.841 45.908,12.714 46.368,12.714 46.833,12.249 58.594,12.249 66.099,19.754 v1@68.636,19.754
USART3_RX3: U1.22 U4.5 | length 24.5
  Top Layer w0.254: U1.22 49.63,7.377 50.668,6.339 56.478,6.339 57.147,7.008 57.147,8.156 v1(57.096,8.207) ; U4.5@65.001,10.756 65.984,10.756 66.165,10.937 v1(66.259,10.937)
  Bottom Layer w0.254: v1(57.096,8.207) 59.826,10.937 v1(66.259,10.937)
USART3_TX3: U1.21 U4.4 | length 26.9
  Top Layer w0.254: U1.21 49.13,7.128 50.323,5.935 56.759,5.935 57.739,6.915 57.739,9.373 59.88,11.514 66.533,11.514 67.283,10.764 67.827,10.764 U4.4
V_MCU_3.3V: C4.2 C5.2 C6.2 C7.2 C8.2 C9.2 C10.2 C11.2 C17.1 J1.1 R2.2 S1.2 U1.9 U1.24 U1.36 U1.48 U2.3 U2.6 U3.3 U3.6 U4.3 U4.6 U7.5 | length 26.8
  Top Layer w0.254: v1(63.378,28.818) 63.894,28.302 65.009,28.302 U2.6 66.254,28.294 ; U4.3 67.843,10.248 73.989,10.248 74.047,10.306 v1(74.087,10.306)
  Top Layer w0.3: R2.2 29.193,28.003 29.193,28.806 v1(29.196,28.809) ; S1.2 38.086,25.72 38.759,25.047 38.759,24.875 v1(38.778,24.856) ; v1@57.132,19.265 57.376,19.509 63.932,19.509 64.099,19.342 64.214,19.342 64.264,19.292 64.748,19.292 U3.6 U3.3 ; U4.6 U4.3 ; 66.254,28.294 U2.3
  other v1: 52.597,10.32 53.486,10.32 42.237,10.77 52.597,11.209 53.486,11.209 42.237,11.659 32.193,12.417 33.082,12.417 42.245,12.594 41.183,12.614 31.343,13.424 32.229,13.423 33.118,13.423 31.343,14.43 32.229,14.43 33.118,14.43 52.599,18.794 53.488,18.794 57.132,19.242 52.599,19.683 53.488,19.683 43.507,20.531 44.396,20.531 43.507,21.42 44.396,21.42
pads on no net: U1.1 U1.2 U1.3 U1.4 U1.10 U1.11 U1.15 U1.16 U1.17 U1.18 U1.19 U1.25 U1.26 U1.27 U1.28 U1.29 U1.33 U1.39 U1.40 U1.41 U1.42 U1.43 U1.45 U1.46 U7.4

## Polygon pours and split planes (outlines as drawn)
+5V on Top Layer "+5V_L01_P032" (solid, pour order 32): 69.965,27.108 69.838,26.981 69.838,26.346 69.584,26.092 67.679,26.092 67.679,25.076 69.838,25.076 71.616,25.076 71.616,26.981 71.489,27.108
+5V on Top Layer "+5V_L01_P018" (solid, pour order 18): 29.004,4.239 27.421,4.239 20.561,4.239 14.987,9.813 14.987,16.361 14.092,17.256 10.803,17.256 10.803,18.815 16.088,18.815 17.8,17.103 17.8,12.544 29.004,12.544
GND on Top Layer "GND_L01_P036" (solid, pour order 36): 24.8,0 42.3,0 42.3,1.8 44.8,1.8 44.8,0 45.8,0 45.8,1.8 56.3,1.8 56.3,0 57.3,0 57.3,1.8 59.8,1.8 59.8,0 60.8,0 60.8,0.5 67.8,0.5 67.8,0 85.6,0 85.6,31.6 67.8,31.6 67.8,31.1 60.8,31.1 60.8,31.6 59.8,31.6 59.8,29.8 57.3,29.8 57.3,31.6 56.3,31.6 56.3,29.8 45.8,29.8 45.8,31.6 44.8,31.6 44.8,29.8 42.3,29.8 42.3,31.6 24.8,31.6 24.8,31.1 17.8,31.1 17.8,31.6 0,31.6 0,0 17.8,0 17.8,0.5 24.8,0.5
V_MCU_3.3V on Top Layer "NONET_L-01_P-001" (solid, pour order 31): 33.73,12.171 33.399,11.84 30.129,11.84 30.129,14.763 33.501,14.763 33.73,14.534
V_MCU_3.3V on Top Layer "NONET_L-01_P-001" (solid, pour order 30): 45.276,23.075 45.276,18.347 44.9,18.347 42.532,20.715 42.532,23.075
V_MCU_3.3V on Top Layer "NONET_L-01_P-001" (solid, pour order 29): 42.973,13.509 42.658,13.194 42.658,9.303 42.56,9.205 40.51,9.205 40.447,9.268 40.447,12.744 41.555,13.852 44.465,13.852 44.465,13.581 44.393,13.509
V_MCU_3.3V on Top Layer "NONET_L-01_P-001" (solid, pour order 28): 54.568,9.082 54.705,9.219 54.705,9.827 54.705,10.571 53.742,11.534 50.42,11.534 50.42,10.075 51.413,9.082
V_MCU_3.3V on Top Layer "NONET_L-01_P-001" (solid, pour order 23): 51.309,17.503 55.119,17.503 55.246,17.63 55.246,20.297 52.325,20.297 51.309,19.281
+12V on Top Layer "+12V_L01_P014" (solid, pour order 14): 4.446,16.614 1.991,19.069 1.991,24.298 2.18,24.487 4.192,24.487 4.192,20.805 6.478,18.519 6.478,17.376 5.716,16.614
+5V on Top Layer "+5V_L01_P020" (solid, pour order 20): 69.851,9.248 69.724,9.121 69.724,8.486 69.47,8.232 67.565,8.232 67.565,7.279 71.502,7.279 71.502,9.121 71.375,9.248
+5V on Top Layer "+5V_L01_P019" (solid, pour order 19): 69.978,18.011 69.851,17.884 69.851,17.249 69.597,16.995 67.692,16.995 67.692,15.979 69.851,15.979 71.629,15.979 71.629,17.884 71.502,18.011
NetD2_C on Top Layer "NETD2_C_L01_P016" (solid, pour order 16): 13.844,20.483 13.844,22.07 8.27,22.07 6.986,20.786 6.986,5.184 8.002,4.168 13.336,4.168 13.454,4.286 13.454,9.551 13.249,9.756 10.796,9.756 9.461,11.091 9.461,19.47 10.474,20.483
NetC13_1 on Top Layer "NETC13_1_L01_P015" (solid, pour order 15): 4.247,27.718 3.811,27.282 3.811,25.885 4.065,25.631 5.589,25.631 6.612,24.608 6.612,22.548 16.73,22.548 17.019,22.837 17.019,27.282 16.583,27.718
V_MCU_3.3V on PWR "V_MCU_3.3V_L02_P035" (solid, remove dead copper, pour order 35): 24.8,0 42.3,0 42.3,1.8 44.8,1.8 44.8,0 45.8,0 45.8,1.8 56.3,1.8 56.3,0 57.3,0 57.3,1.8 59.8,1.8 59.8,0 60.8,0 60.8,0.5 67.8,0.5 67.8,0 85.6,0 85.6,31.6 67.8,31.6 67.8,31.1 60.8,31.1 60.8,31.6 59.8,31.6 59.8,29.8 57.3,29.8 57.3,31.6 56.3,31.6 56.3,29.8 45.8,29.8 45.8,31.6 44.8,31.6 44.8,29.8 42.3,29.8 42.3,31.6 24.8,31.6 24.8,31.1 17.8,31.1 17.8,31.6 0,31.6 0,0 17.8,0 17.8,0.5 24.8,0.5
+5V on PWR "+5V_L02_P022" (solid, pour order 22): 71.557,8.478 65.14,2.061 24.145,2.061 24.145,7.73 54.236,7.73 58.259,11.753 58.259,25.749 60.659,28.149 71.557,28.149
GND on GND "GND_L03_P033" (solid, pour order 33): 24.8,0 42.3,0 42.3,1.8 44.8,1.8 44.8,0 45.8,0 45.8,1.8 56.3,1.8 56.3,0 57.3,0 57.3,1.8 59.8,1.8 59.8,0 60.8,0 60.8,0.5 67.8,0.5 67.8,0 85.6,0 85.6,31.6 67.8,31.6 67.8,31.1 60.8,31.1 60.8,31.6 59.8,31.6 59.8,29.8 57.3,29.8 57.3,31.6 56.3,31.6 56.3,29.8 45.8,29.8 45.8,31.6 44.8,31.6 44.8,29.8 42.3,29.8 42.3,31.6 24.8,31.6 24.8,31.1 17.8,31.1 17.8,31.6 0,31.6 0,0 17.8,0 17.8,0.5 24.8,0.5
GND on Bottom Layer "GND_L04_P034" (solid, remove dead copper, pour order 34): 24.8,0 42.3,0 42.3,1.8 44.8,1.8 44.8,0 45.8,0 45.8,1.8 56.3,1.8 56.3,0 57.3,0 57.3,1.8 59.8,1.8 59.8,0 60.8,0 60.8,0.5 67.8,0.5 67.8,0 85.6,0 85.6,31.6 67.8,31.6 67.8,31.1 60.8,31.1 60.8,31.6 59.8,31.6 59.8,29.8 57.3,29.8 57.3,31.6 56.3,31.6 56.3,29.8 45.8,29.8 45.8,31.6 44.8,31.6 44.8,29.8 42.3,29.8 42.3,31.6 24.8,31.6 24.8,31.1 17.8,31.1 17.8,31.6 0,31.6 0,0 17.8,0 17.8,0.5 24.8,0.5
GND on Bottom Layer "GND_L04_P004" (solid, pour order 4): 67.632,25.904 67.867,26.139 69.47,26.139 69.724,26.393 69.724,27.028 69.851,27.155 71.375,27.155 71.502,27.028 71.502,25.123 69.724,25.123 67.632,25.123

## Silkscreen, mask and mechanical layers (free items; w line width, h text height)
Top Overlay:
  text "PETA Com Controller" at 37.862,2.568 h1
Bottom Overlay:
  text "A1" at 77.369,27.707 h1
  text "GND" at 47.628,26.215 h1.52 r90
  text "CLK" at 50.278,26.215 h1.52 r90
  text "DIO" at 52.679,26.215 h1.52 r90
  text "VCC" at 55.233,26.214 h1.52 r90
  text "B1" at 77.369,22.747 h1
  text "12V~24V DC IN" at 2.774,19.985 h1.52 r90
  text "A2" at 77.369,17.844 h1
  text "VCC" at 10.211,17.584 h1.52
  text "GND" at 10.014,12.587 h1.52
  text "B2" at 77.369,12.47 h1
  text "A3" at 77.369,7.653 h1
  text "B3" at 77.369,2.606 h1